# Altium PCB obc-db.PcbDoc
Units mm, origin at the board's own origin, x right, y up, seen from the top; angles counter-clockwise.
Board outline 90.17 x 95.88 mm, 4 copper layers (F.Cu, In1.Cu, In2.Cu, B.Cu); 57 components, 155 nets, 316 pads, 84 vias.
Unrouted connection lines stored in the file: 2.
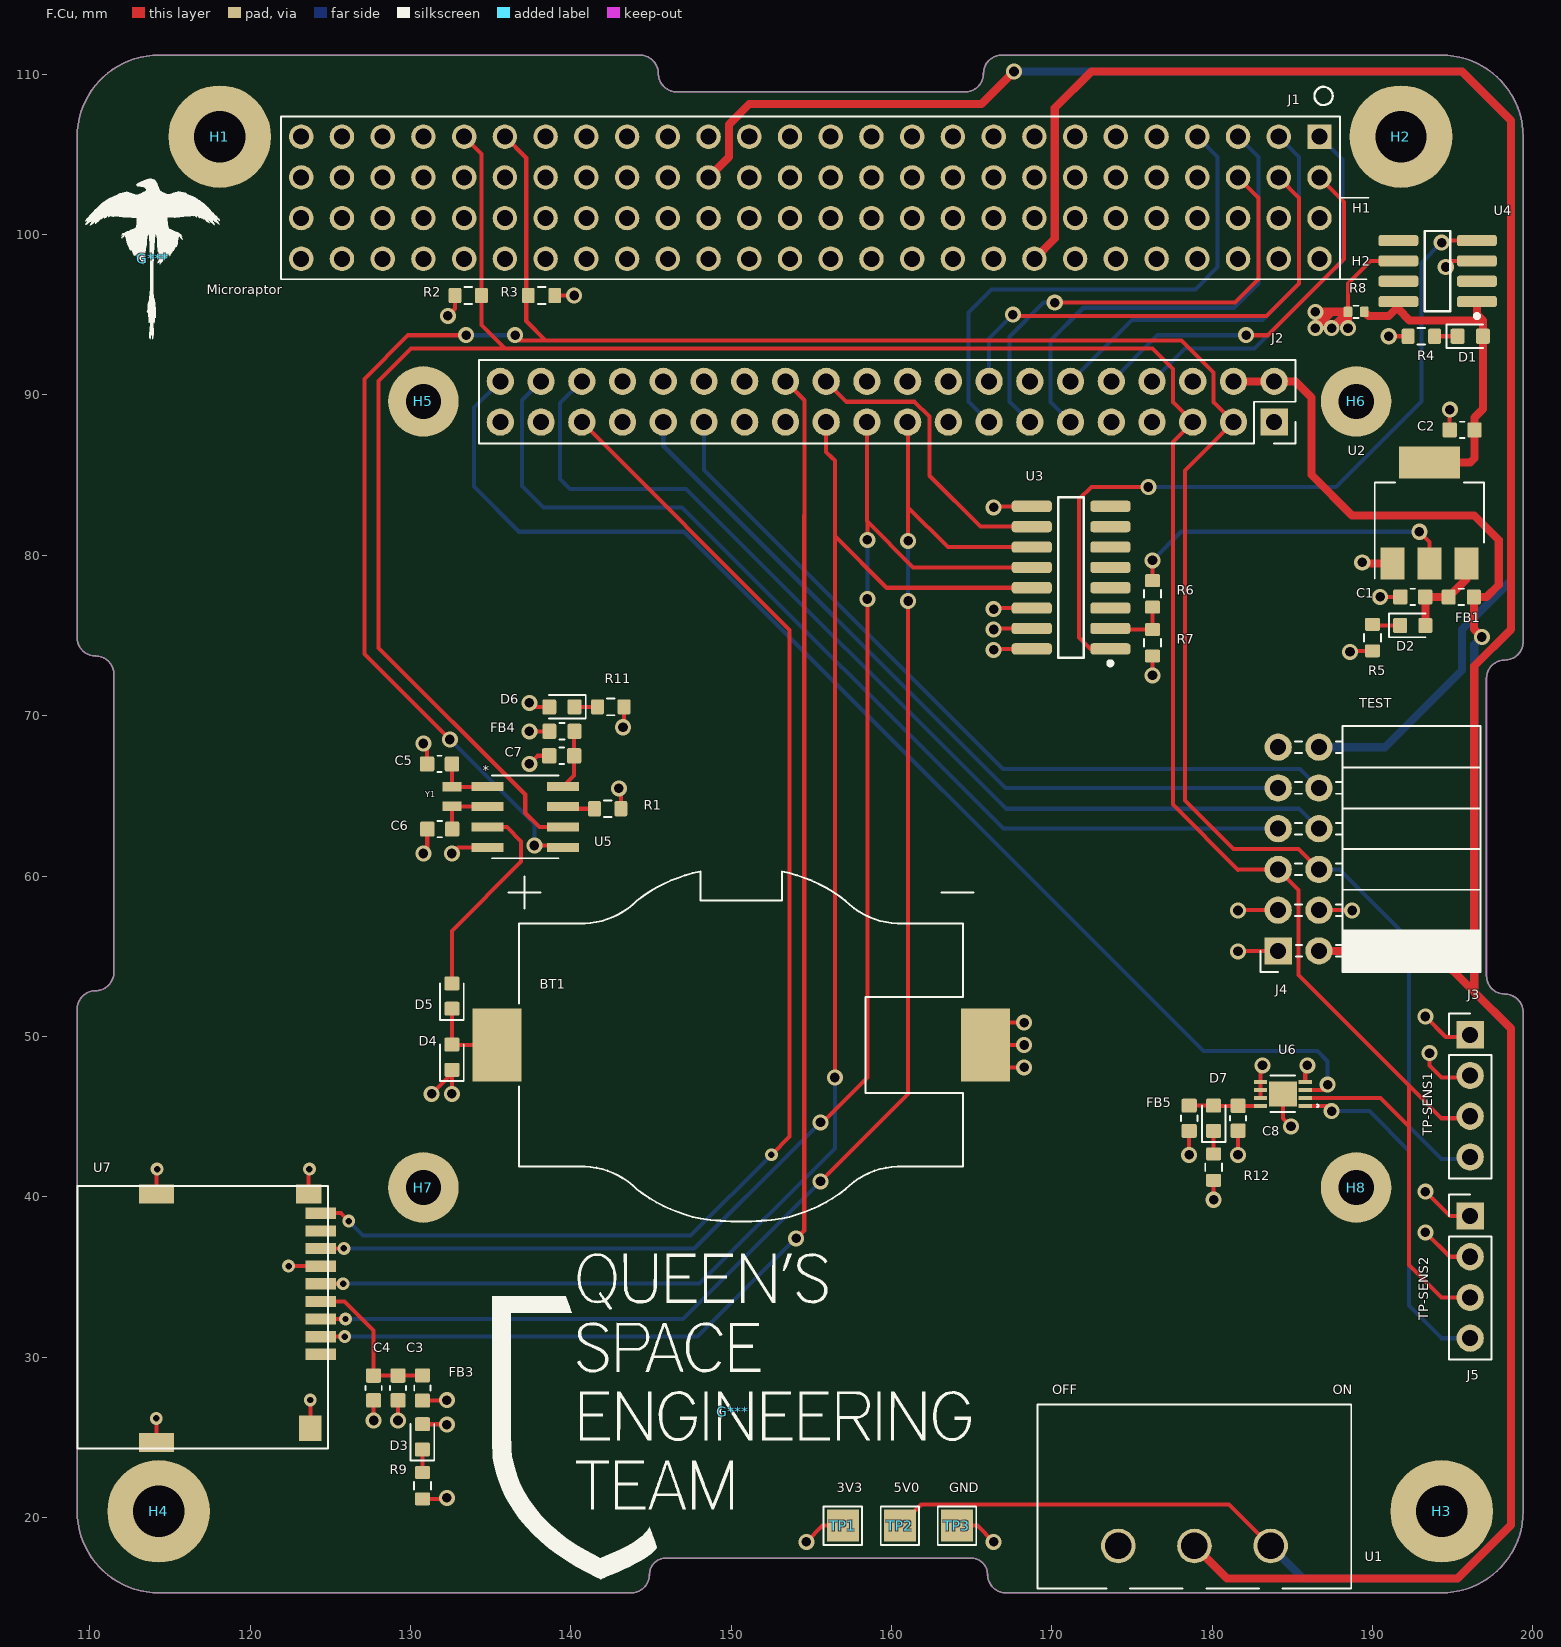
[diagram p0: F.Cu view]
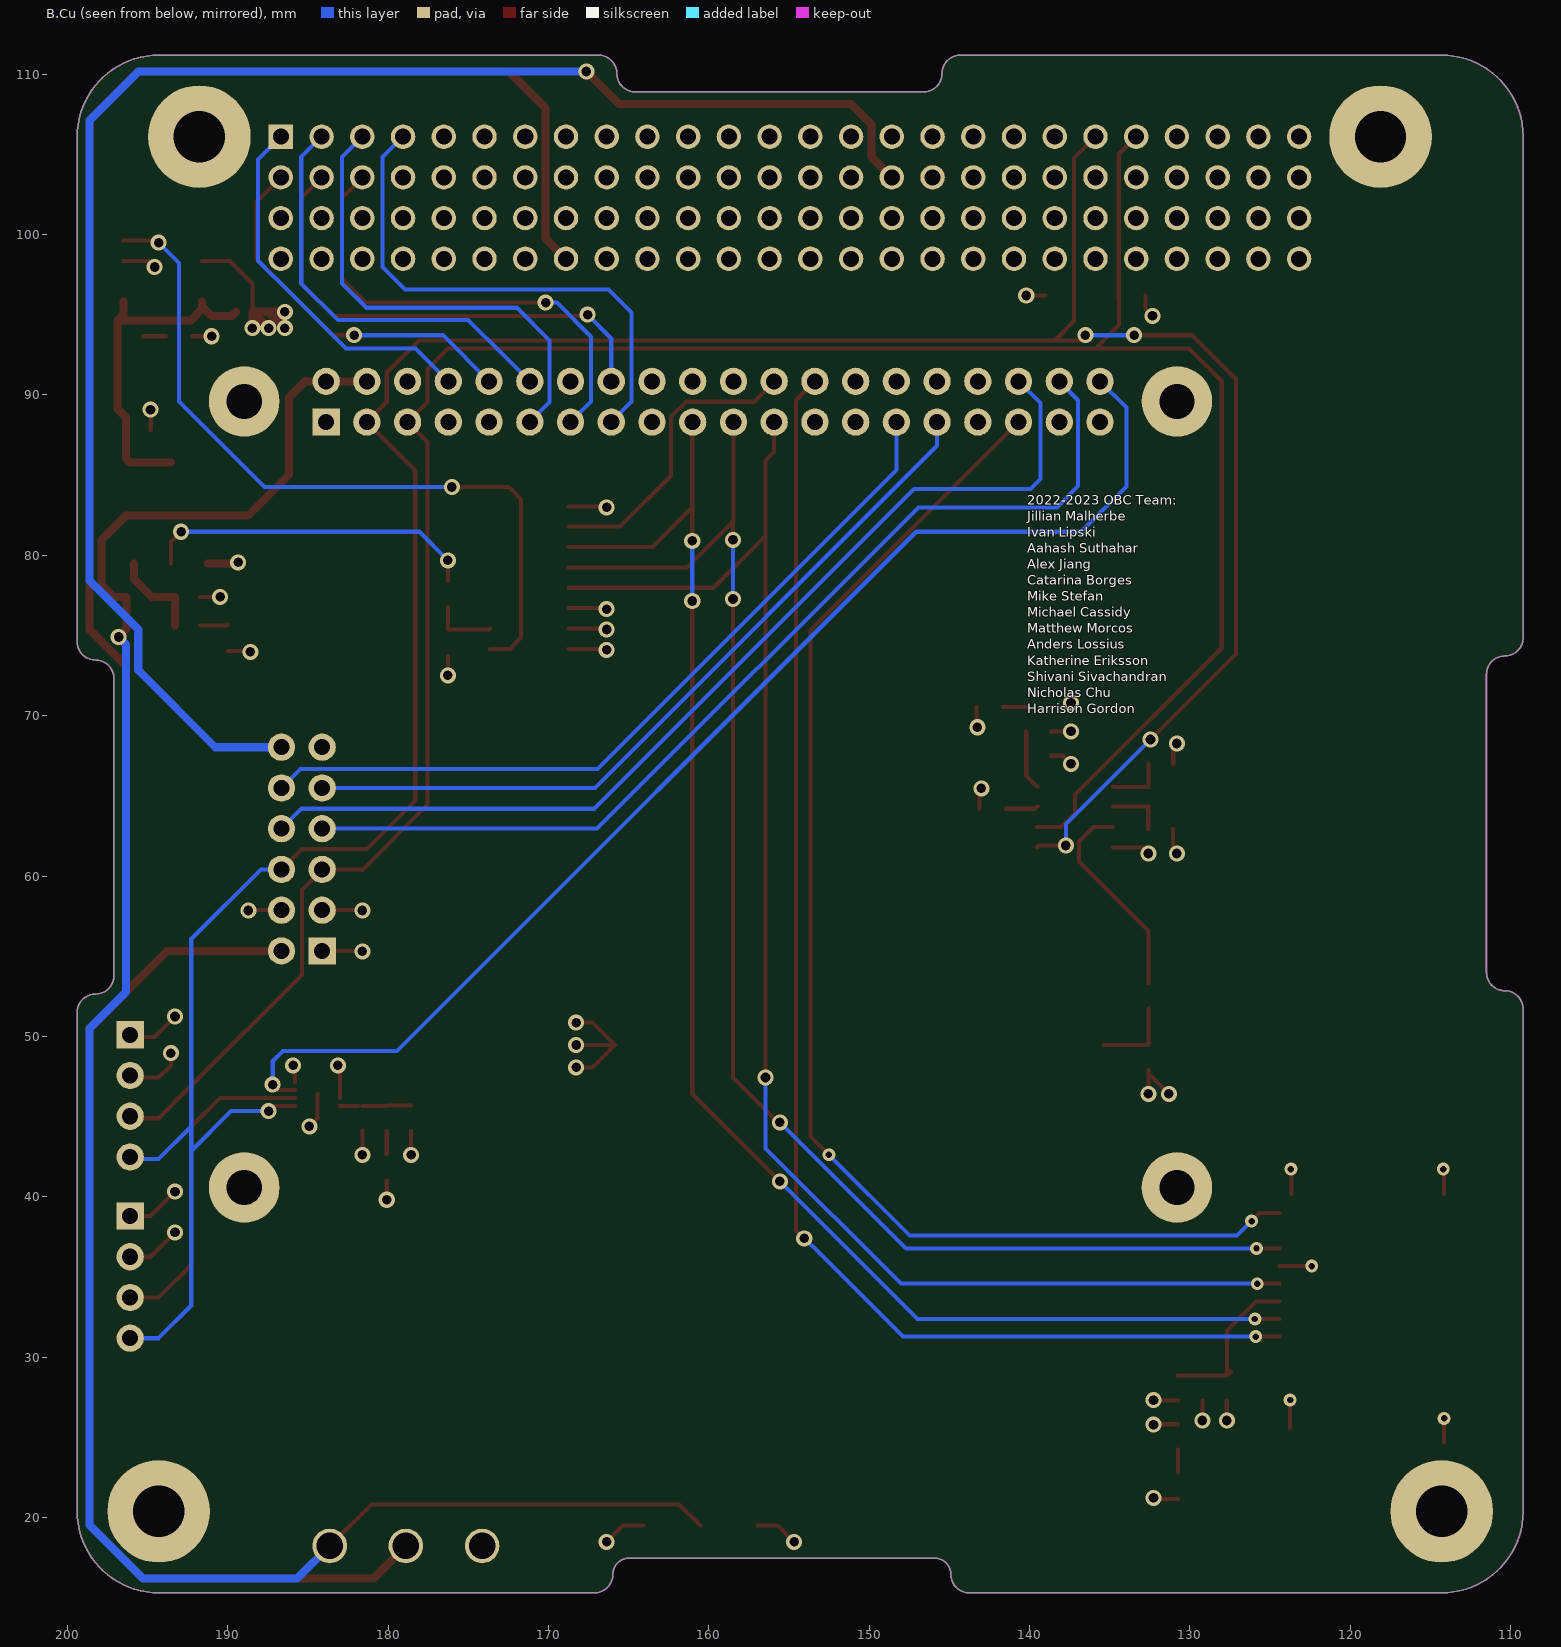
[diagram p1: B.Cu view, seen from below]
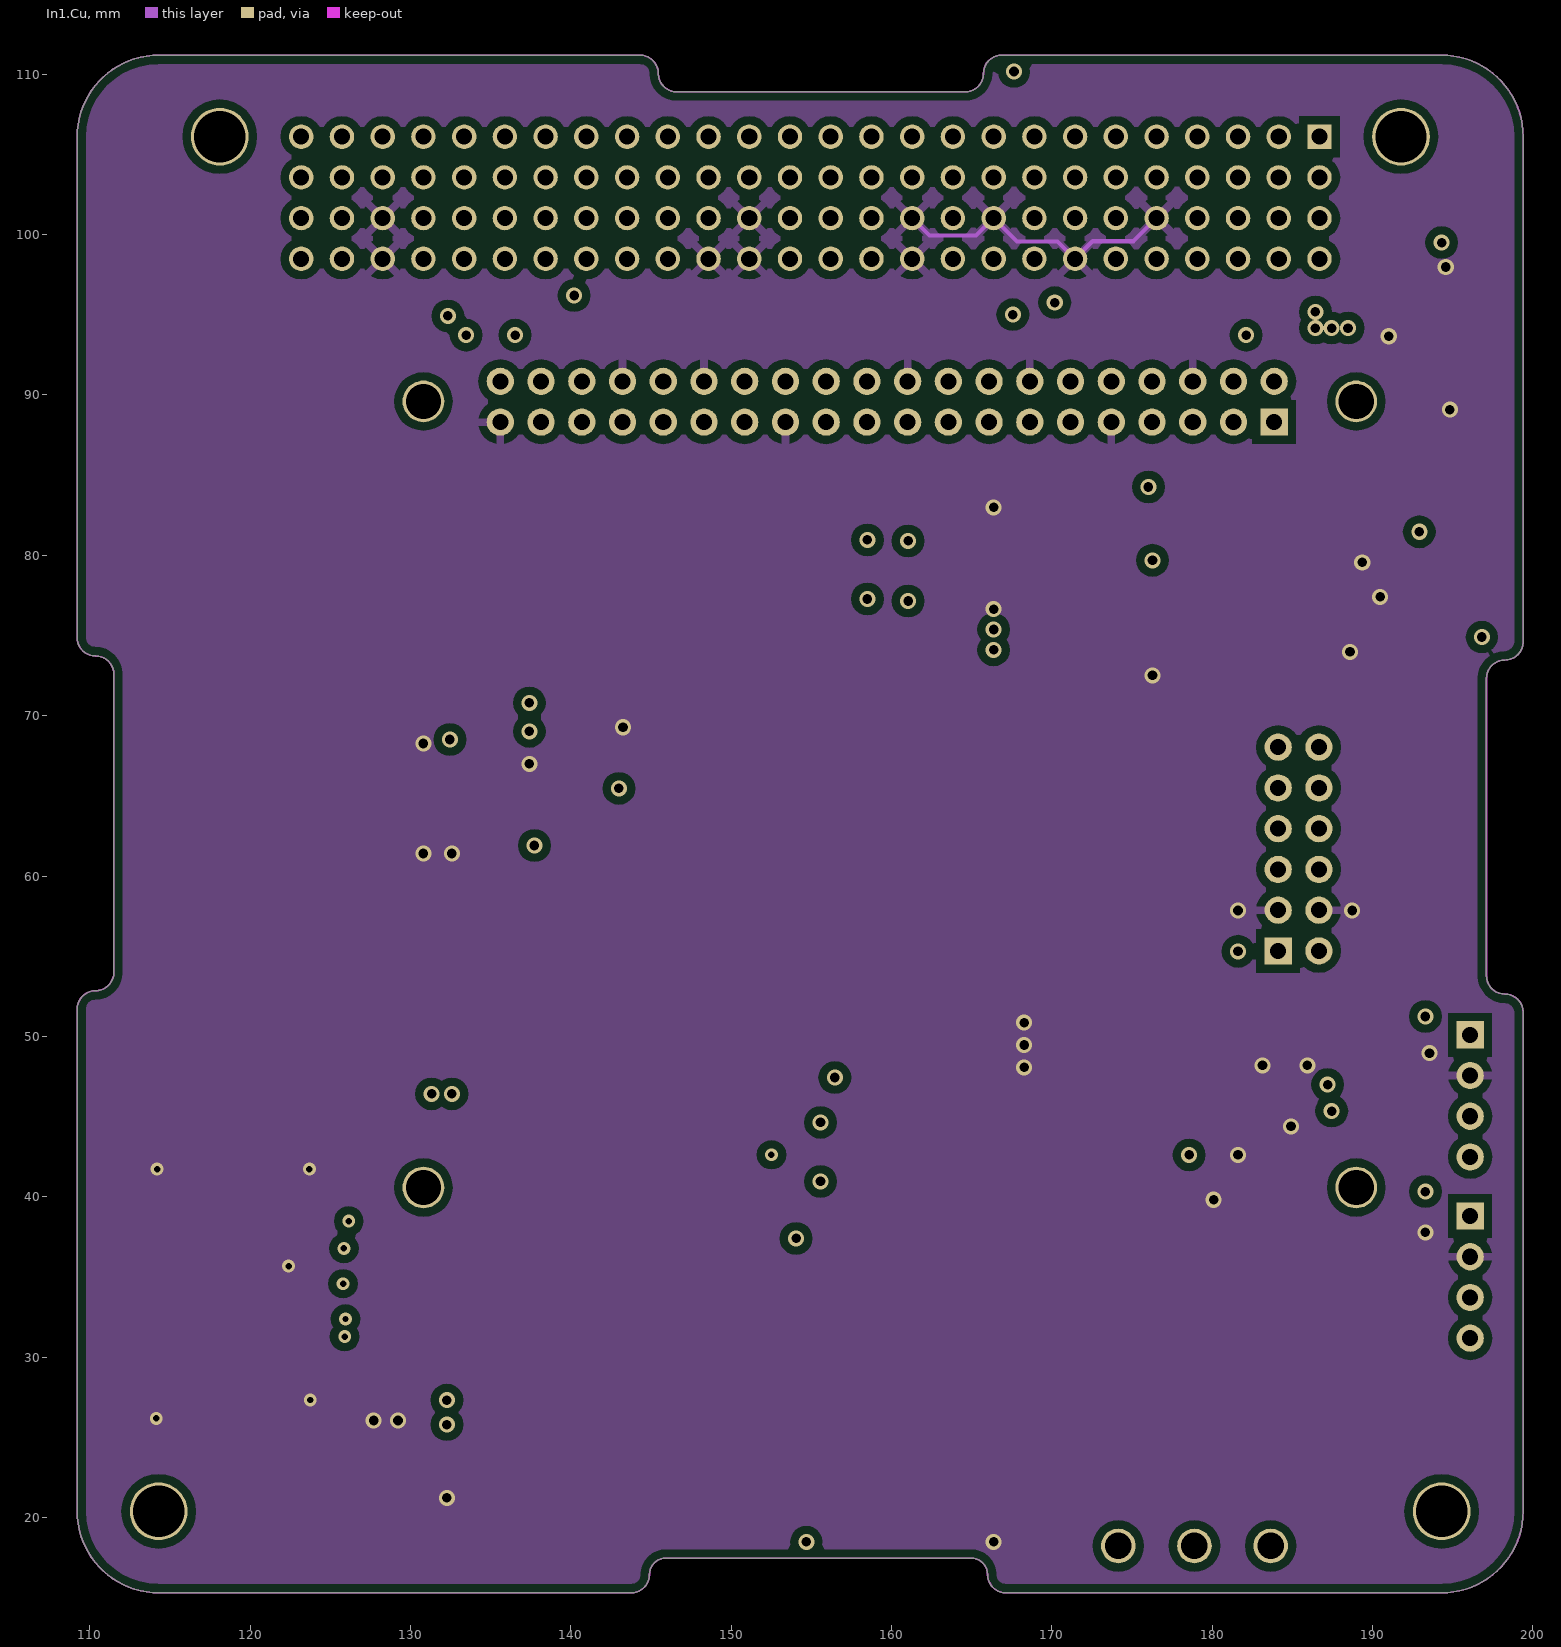
[diagram p2: In1.Cu]
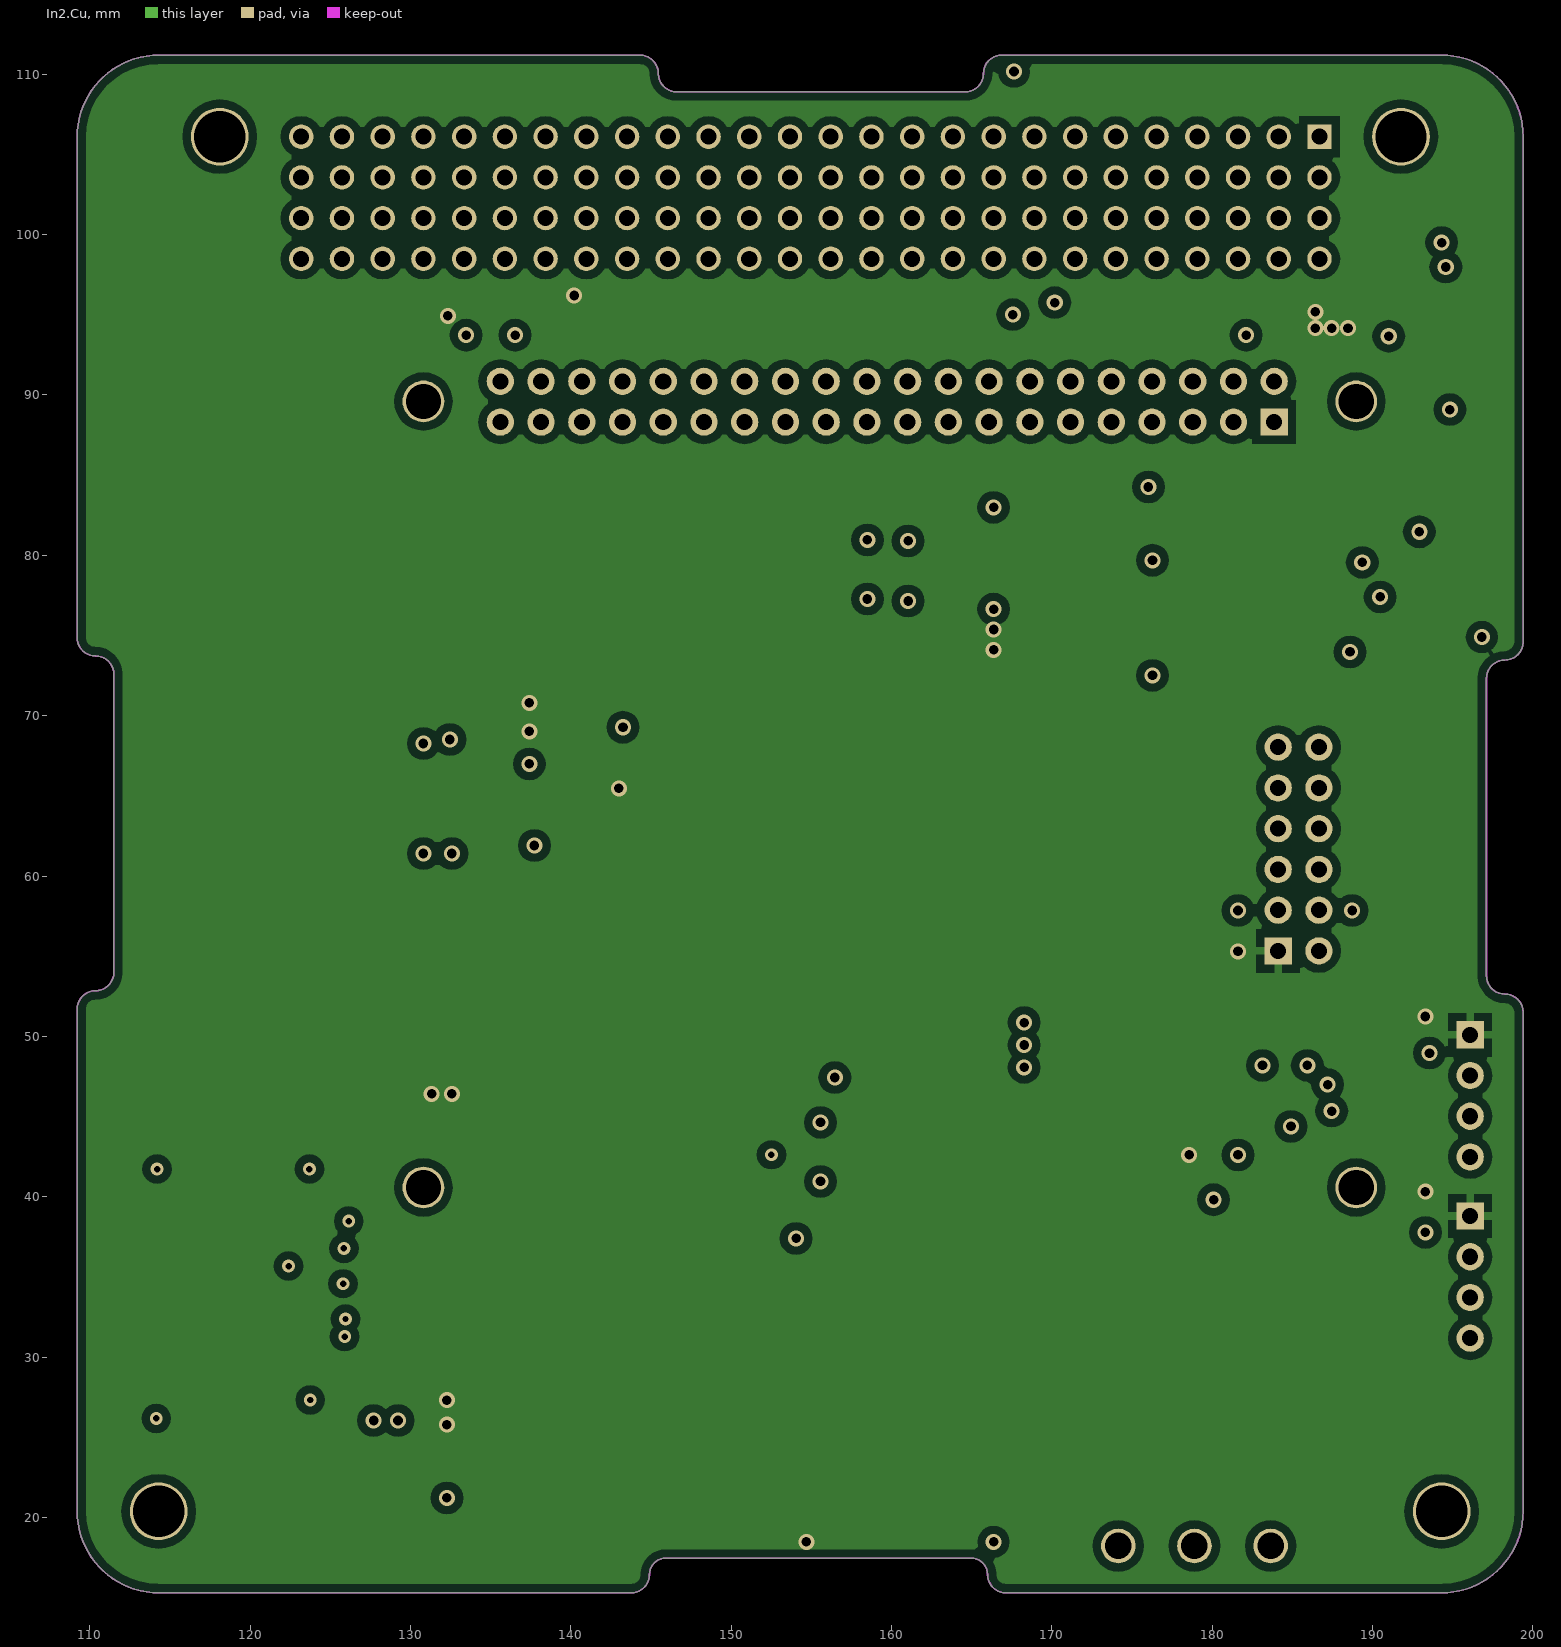
[diagram p3: In2.Cu]

## Layer stack, top to bottom
F.Mask: solder mask 0.0102, Solder Resist, Dk 3.5
F.Cu: signal copper 0.0356
Dielectric 1: dielectric 0.32, FR-4, Dk 4.8
In1.Cu: signal copper 0.0356
Dielectric2: dielectric 0.32, FR-4, Dk 4.8
In2.Cu: signal copper 0.0356
Dielectric3: dielectric 0.32, FR-4, Dk 4.8
B.Cu: signal copper 0.0356
B.Mask: solder mask 0.0102, Solder Resist, Dk 3.5

## Board outline
109.22,74.867 109.22,106.109 cw(c114.3,106.109) 114.3,111.189 144.318,111.189 cw(c144.318,110.046) 145.461,110.046 ccw(c146.604,110.046) 146.604,108.903 164.592,108.903 ccw(c164.592,110.046) 165.735,110.046 cw(c166.878,110.046) 194.31,111.189 cw(c194.31,106.109) 199.39,106.109 199.39,74.613 cw(c198.247,74.613) 198.247,73.47 ccw(c198.247,72.327) 197.104,72.327 197.104,53.785 ccw(c198.247,53.785) 198.247,52.642 cw(c198.247,51.499) 199.39,51.499 199.39,20.384 cw(c194.31,20.384) 194.31,15.304 167.132,15.304 cw(c167.132,16.447) 165.989,16.447 ccw(c164.973,16.447) 164.973,17.463 145.923,17.463 ccw(c145.923,16.447) 144.907,16.447 cw(c143.764,16.447) 143.764,15.304 114.3,15.304 cw(c114.3,20.384) 109.22,20.384 109.22,51.707 cw(c110.363,51.707) 110.363,52.85 ccw(c110.363,53.993) 111.506,53.993 111.506,72.581 ccw(c110.363,72.581) 110.363,73.724 cw(c110.363,74.867) 109.22,74.867

## Design rules (kind name [scope] priority, off if disabled: settings)
Clearance "Clearence 0.508_Polygon" [InNamedPolygon('In1.Cu-GND') OR InNamedPolygon('In2.Cu-+3V3')] p1: gap=0.508 ignorepadtopadclearanceinfootprint=FALSE
MinimumSolderMaskSliver [All] p1: minsoldermaskwidth=0
PolygonConnect Polygon_In2.Cu-+3V3_ConnectDirect [IsNamedPolygon('In2.Cu-+3V3') vs IsVia] p1: connectstyle=Direct reliefconductorwidth=0.254 reliefentries=4 polygonreliefangle="90 Angle" airgapwidth=0.254
PolygonConnect Polygon_In2.Cu-+3V3_ConnectRelief45 [IsNamedPolygon('In2.Cu-+3V3') vs (IsThruPin or IsSMTPin) and (PadShape_AllLayers = 'Round')] p2: connectstyle=Relief reliefconductorwidth=0.508 reliefentries=4 polygonreliefangle="45 Angle" airgapwidth=0.508
PolygonConnect Polygon_In2.Cu-+3V3_ConnectRelief90 [IsNamedPolygon('In2.Cu-+3V3') vs (IsThruPin or IsSMTPin) and (PadShape_AllLayers <> 'Round')] p3: connectstyle=Relief reliefconductorwidth=0.508 reliefentries=4 polygonreliefangle="90 Angle" airgapwidth=0.508
PolygonConnect Polygon_In1.Cu-GND_ConnectDirect [IsNamedPolygon('In1.Cu-GND') vs IsVia] p4: connectstyle=Direct reliefconductorwidth=0.254 reliefentries=4 polygonreliefangle="90 Angle" airgapwidth=0.254
PolygonConnect Polygon_In1.Cu-GND_ConnectRelief45 [IsNamedPolygon('In1.Cu-GND') vs (IsThruPin or IsSMTPin) and (PadShape_AllLayers = 'Round')] p5: connectstyle=Relief reliefconductorwidth=0.508 reliefentries=4 polygonreliefangle="45 Angle" airgapwidth=0.508
PolygonConnect Polygon_In1.Cu-GND_ConnectRelief90 [IsNamedPolygon('In1.Cu-GND') vs (IsThruPin or IsSMTPin) and (PadShape_AllLayers <> 'Round')] p6: connectstyle=Relief reliefconductorwidth=0.508 reliefentries=4 polygonreliefangle="90 Angle" airgapwidth=0.508
RoutingVias [All] p1: holewidth=0.711 width=1.27 viastyle="Through Hole" minholewidth=0.711 minwidth=1.27 maxholewidth=0.711 maxwidth=1.27
SilkToSilkClearance [All] p1: silktosilkclearance=0
SilkToSolderMaskClearance [IsPad] p1: minsilkscreentomaskgap=0 clearancetoexposedcopper=TRUE
SolderMaskExpansion [All] p1: expansion=0.102 istentingtop=FALSE
Width [All] p1: maxlimit=10 minlimit=0.254 preferedwidth=0.254 minimp=50.000000 maximp=50.000000 favimp=50.000000
27 further rules are at their usual default settings.

## Components (designator, comment, footprint, x,y, rotation, side; value= is the part's Value field where it differs from the comment)
BT1 "BHSD-2032-SM" BAT_BHSD-2032-SM 150.622,49.467 r0 top
C1 "22uF" C_0603_1608Metric 192.507,77.407 r0 top
C2 "22uF" C_0603_1608Metric 195.58,87.821 r180 top
C3 "10uF" C_0603_1608Metric 129.226,28.077 r270 top
C4 "0.1uF" C_0603_1608Metric 127.702,28.077 r270 top
C5 "18pF" C_0603_1608Metric 131.813,66.993 r0 top
C6 "18pF" C_0603_1608Metric 131.826,62.929 r0 top
C7 "10uF" C_0603_1608Metric 139.433,67.501 r0 top
C8 "0.1uF" C_0603_1608Metric 181.61,44.895 r270 top
D1 "LED" LED_0603_1608Metric 196.088,93.663 r0 top
D2 "LED" LED_0603_1608Metric 192.507,75.629 r0 top
D3 "LED" LED_0603_1608Metric 130.75,25.029 r90 top
D4 "DIODE" D_0603_1608Metric 132.588,48.705 r90 top
D5 "DIODE" D_0603_1608Metric 132.588,52.515 r90 top
D6 "LED" LED_0603_1608Metric 139.446,70.549 r180 top
D7 "LED" LED_0603_1608Metric 180.086,44.895 r90 top
FB1 "100R @ 100 MHz" L_0603_1608Metric 195.529,77.407 r0 top
FB3 "100R @ 100 MHz" L_0603_1608Metric 130.75,28.077 r90 top
FB4 "100R @ 100 MHz" L_0603_1608Metric 139.446,69.025 r0 top
FB5 "100R @ 100 MHz" L_0603_1608Metric 178.562,44.895 r90 top
G*** "LOGO" microraptor 113.919,98.489 r0 top
G*** "LOGO" Logosmaller 150.114,26.607 r0 top
H1 "MountingHole_Pad" MountingHole_3.2mm_M3_Pad_TopBottom 118.11,106.109 r0 top
H2 "MountingHole_Pad" MountingHole_3.2mm_M3_Pad_TopBottom 191.77,106.109 r0 top
H3 "MountingHole_Pad" MountingHole_3.2mm_M3_Pad_TopBottom 194.31,20.384 r0 top
H4 "MountingHole_Pad" MountingHole_3.2mm_M3_Pad_TopBottom 114.3,20.384 r0 top
H5 "MountingHole_Pad" MountingHole_2.2mm_M2_Pad_TopBottom 130.81,89.599 r0 top
H6 "MountingHole_Pad" MountingHole_2.2mm_M2_Pad_TopBottom 188.976,89.599 r0 top
H7 "MountingHole_Pad" MountingHole_2.2mm_M2_Pad_TopBottom 130.81,40.577 r0 top
H8 "MountingHole_Pad" MountingHole_2.2mm_M2_Pad_TopBottom 188.976,40.577 r0 top
J1 "PC104_Connector" pc104-connector 156.21,103.569 r270 top
J2 "Raspberry Pi 4 Connector" PinSocket_2x20_P2.54mm_Vertical 183.866,88.309 r270 top
J3 "Temp Sens1 Connector" PinHeader_1x04_P2.54mm_Vertical 196.088,50.102 r0 top
J4 "Test Connector" PinSocket_2x06_P2.54mm_Horizontal 184.113,55.334 r180 top
J5 "Temp Sens2 Connector" PinHeader_1x04_P2.54mm_Vertical 196.088,38.799 r0 top
R1 "10k" R_0603_1608Metric 142.303,64.199 r180 top
R2 "10k" R_0603_1608Metric 133.604,96.203 r0 top
R3 "10k" R_0603_1608Metric 138.176,96.203 r180 top
R4 "2.2k" R_0603_1608Metric 193.04,93.663 r180 top
R5 "2.2k" R_0603_1608Metric 189.992,74.867 r270 top
R6 "20k" R_0603_1608Metric 176.276,77.598 r270 top
R7 "10k" R_0603_1608Metric 176.276,74.55 r270 top
R8 "100m" R_0402_1005Metric 188.976,95.187 r180 top
R9 "2.2k" R_0603_1608Metric 130.75,21.981 r270 top
R11 "2.2k" R_0603_1608Metric 142.494,70.549 r0 top
R12 "2.2k" R_0603_1608Metric 180.086,41.847 r270 top
TP1 "3V3" TestPoint_Pad_2.0x2.0mm 156.972,19.495 r0 top
TP2 "5V0" TestPoint_Pad_2.0x2.0mm 160.528,19.495 r0 top
TP3 "GND" TestPoint_Pad_2.0x2.0mm 164.084,19.495 r0 top
U1 "L102021MS02Q" L102021MS02Q 183.642,18.225 r180 top
U2 "AZ1117IH-3.3TRG1" SOT-223-3_TabPin2 193.548,82.639 r90 top
U3 "MCP3008-I/SL" Microchip-MCP3008-I_SL-Level_A 171.196,78.614 r180 top
U4 "MAX4372FESA+" Maxim-MAX4372FESA+-Level_A 194.056,97.727 r180 top
U5 "MCP79400T-I/SN" MCP79400T-I&slash_SN 137.16,63.691 r0 top
U6 "MCP9808T-E/MC" MCP9808T-E&slash_MC 184.404,46.419 r180 top
U7 "MR01A-01211" MR01A-01211 109.25,40.679 r270 top
Y1 "CM9V-T1A" XTAL_CM9V-T1A-32.768KHZ-9PF-20PPM-TA-QC 132.588,64.961 r270 top

## Footprints (in the part's own frame and the unit in brackets; to place one, negate y for a bottom-side part, rotate by r counter-clockwise, add the part's x,y. Pads: shape width x height; smd on the part's side, far side on the other; paste and mask are expansions set on the pad)
BAT_BHSD-2032-SM [mm]
  rect 3.05x4.57 smd mask+0: +(-15.235,0) -(15.235,0)
  silkscreen extent -14.5,-11.02 14.5,10.83
C_0603_1608Metric [mm]
  rrect25% 0.9x0.95 smd mask+0: 1(-0.775,0) 2(0.775,0)
  silkscreen extent -0.14,-0.51 0.14,0.51
D_0603_1608Metric [mm]
  rrect25% 0.875x0.95 smd mask+0: 1(-0.787,0) 2(0.787,0)
  silkscreen extent -1.49,-0.73 0.8,0.73
L102021MS02Q [mil]
  round 85 hole 65 paste-99999 mask+0: 1(0,0) 2(187.01,0) 3(374.02,0)
  silkscreen extent -198,-348 572,105
L_0603_1608Metric [mm]
  rrect25% 0.875x0.95 smd mask+0: 1(-0.787,0) 2(0.787,0)
  silkscreen extent -0.16,-0.51 0.16,0.51
LED_0603_1608Metric [mm]
  rrect25% 0.875x0.95 smd mask+0: 1(-0.787,0) 2(0.787,0)
  silkscreen extent -1.49,-0.73 0.8,0.73
Logosmaller [mm]
  silkscreen extent -15.01,-10.45 14.83,9.86
Maxim-MAX4372FESA+-Level_A [mm]
  rrect50% 2.5x0.7 smd mask+0: 1(-2.45,1.905) 2(-2.45,0.635) 3(-2.45,-0.635) 4(-2.45,-1.905) 5(2.45,-1.905) 6(2.45,-0.635) 7(2.45,0.635) 8(2.45,1.905)
  silkscreen extent -2.58,-2.5 0.8,2.93
MCP9808T-E&slash_MC [mil]
  rect 32x10 smd mask+0: 1(-55,29.53) 2(-55,9.84) 3(-55,-9.84) 4(-55,-29.53) 5(55,-29.53) 6(55,-9.84) 7(55,9.84) 8(55,29.53)
  rect 69x61 smd mask+0: 9(0,0)
  silkscreen extent -88,-45 31,45
MCP79400T-I&slash_SN [mil]
  rect 78x22 smd mask+0: 1(-93,75) 2(-93,25) 3(-93,-25) 4(-93,-75) 5(93,-75) 6(93,-25) 7(93,25) 8(93,75)
  silkscreen extent -82,-102 82,102
Microchip-MCP3008-I_SL-Level_A [mm]
  rrect50% 2.5x0.7 smd mask+0: 1(-2.45,4.445) 2(-2.45,3.175) 3(-2.45,1.905) 4(-2.45,0.635) 5(-2.45,-0.635) 6(-2.45,-1.905) 7(-2.45,-3.175) 8(-2.45,-4.445) 9(2.45,-4.445) 10(2.45,-3.175) 11(2.45,-1.905) 12(2.45,-0.635) 13(2.45,0.635) 14(2.45,1.905) 15(2.45,3.175) 16(2.45,4.445)
  silkscreen extent -2.58,-5 0.8,5.47
microraptor [mm]
  silkscreen extent -4.2,-5 4.2,5
MountingHole_2.2mm_M2_Pad_TopBottom [mm]
  round 4.4 smd paste-4.4 mask+0: 1(0,0)
  round 4.4 smd far side paste-4.4 mask+0: 1(0,0)
  round 2.6 hole 2.2 paste-2539.97 mask+0: 1(0,0)
MountingHole_3.2mm_M3_Pad_TopBottom [mm]
  round 6.4 smd paste-6.4 mask+0: 1(0,0)
  round 6.4 smd far side paste-6.4 mask+0: 1(0,0)
  round 3.6 hole 3.2 paste-2539.97 mask+0: 1(0,0)
MR01A-01211 [mm]
  rect 0.7x1.9 smd mask+0: 1(10.505,15.16) 2(9.405,15.16) 3(8.305,15.16) 4(7.205,15.16) 5(6.105,15.16) 6(5.005,15.16) 7(3.905,15.16) 8(2.805,15.16) 9(1.705,15.16)
  rect 1.2x1.6 smd mask+0: 10(0.505,14.408)
  rect 1.2x2.2 smd mask+0: 11(0.505,4.908) 12(16.005,4.908)
  rect 1.6x1.4 smd mask+0: 13(15.105,14.508)
  silkscreen extent 0,0 16.38,15.62
pc104-connector [mil]
  rect 60x60 hole 39.37 paste-99999 mask+0: 1(-100,1200)
  round 60 hole 39.37 paste-99999 mask+0: 2(0,1200) 3(-100,1100) 4(0,1100) 5(-100,1000) 6(0,1000) 7(-100,900) 8(0,900) 9(-100,800) 10(0,800) 11(-100,700) 12(0,700) 13(-100,600) 14(0,600) 15(-100,500) 16(0,500) 17(-100,400) 18(0,400) 19(-100,300) 20(0,300) 21(-100,200) 22(0,200) 23(-100,100) 24(0,100) 25(-100,0) 26(0,0) 27(-100,-100) 28(0,-100) 29(-100,-200) 30(0,-200) 31(-100,-300) 32(0,-300) 33(-100,-400) 34(0,-400) 35(-100,-500) 36(0,-500) 37(-100,-600) 38(0,-600) 39(-100,-700) 40(0,-700) 41(-100,-800) 42(0,-800) 43(-100,-900) 44(0,-900) 45(-100,-1000) 46(0,-1000) 47(-100,-1100) 48(0,-1100) 49(-100,-1200) 50(0,-1200) 51(-100,-1300) 52(0,-1300) 53(100,1200) 54(200,1200) 55(100,1100) 56(200,1100) 57(100,1000) 58(200,1000) 59(100,900) 60(200,900) 61(100,800) 62(200,800) 63(100,700) 64(200,700) 65(100,600) 66(200,600) 67(100,500) 68(200,500) 69(100,400) 70(200,400) 71(100,300) 72(200,300) 73(100,200) 74(200,200) 75(100,100) 76(200,100) 77(100,0) 78(200,0) 79(100,-100) 80(200,-100) 81(100,-200) 82(200,-200) 83(100,-300) 84(200,-300) 85(100,-400) 86(200,-400) 87(100,-500) 88(200,-500) 89(100,-600) 90(200,-600) 91(100,-700) 92(200,-700) 93(100,-800) 94(200,-800) 95(100,-900) 96(200,-900) 97(100,-1000) 98(200,-1000) 99(100,-1100) 100(200,-1100) 101(100,-1200) 102(200,-1200) 103(100,-1300) 104(200,-1300)
  silkscreen extent -150,-1350 250,1320
PinHeader_1x04_P2.54mm_Vertical [mm]
  rect 1.7x1.7 hole 1 paste-2539.97 mask+0: 1(0,0)
  rrect100% 1.7x1.7 hole 1 paste-2539.97 mask+0: 2(0,-2.54) 3(0,-5.08) 4(0,-7.62)
  silkscreen extent -1.33,-8.95 1.33,1.33
PinSocket_2x06_P2.54mm_Horizontal [mm]
  rect 1.7x1.7 hole 1 paste-2539.97 mask+0: 1(0,0)
  rrect100% 1.7x1.7 hole 1 paste-2539.97 mask+0: 2(-2.54,0) 3(0,-2.54) 4(-2.54,-2.54) 5(0,-5.08) 6(-2.54,-5.08) 7(0,-7.62) 8(-2.54,-7.62) 9(0,-10.16) 10(-2.54,-10.16) 11(0,-12.7) 12(-2.54,-12.7)
  silkscreen extent -12.63,-14.03 1.11,1.33
PinSocket_2x20_P2.54mm_Vertical [mm]
  rect 1.7x1.7 hole 1 paste-2539.97 mask+0: 1(0,0)
  rrect100% 1.7x1.7 hole 1 paste-2539.97 mask+0: 2(-2.54,0) 3(0,-2.54) 4(-2.54,-2.54) 5(0,-5.08) 6(-2.54,-5.08) 7(0,-7.62) 8(-2.54,-7.62) 9(0,-10.16) 10(-2.54,-10.16) 11(0,-12.7) 12(-2.54,-12.7) 13(0,-15.24) 14(-2.54,-15.24) 15(0,-17.78) 16(-2.54,-17.78) 17(0,-20.32) 18(-2.54,-20.32) 19(0,-22.86) 20(-2.54,-22.86) 21(0,-25.4) 22(-2.54,-25.4) 23(0,-27.94) 24(-2.54,-27.94) 25(0,-30.48) 26(-2.54,-30.48) 27(0,-33.02) 28(-2.54,-33.02) 29(0,-35.56) 30(-2.54,-35.56) 31(0,-38.1) 32(-2.54,-38.1) 33(0,-40.64) 34(-2.54,-40.64) 35(0,-43.18) 36(-2.54,-43.18) 37(0,-45.72) 38(-2.54,-45.72) 39(0,-48.26) 40(-2.54,-48.26)
  silkscreen extent -3.87,-49.59 1.33,1.33
R_0402_1005Metric [mm]
  rrect25% 0.54x0.64 smd mask+0: 1(-0.51,0) 2(0.51,0)
  silkscreen extent -0.15,-0.38 0.15,0.38
R_0603_1608Metric [mm]
  rrect25% 0.8x0.95 smd mask+0: 1(-0.825,0) 2(0.825,0)
  silkscreen extent -0.24,-0.52 0.24,0.52
SOT-223-3_TabPin2 [mm]
  rect 2x1.5 smd mask+0: 1(-3.15,2.3) 2(-3.15,0) 3(-3.15,-2.3)
  rect 2x3.8 smd mask+0: 2(3.15,0)
  silkscreen extent -4.1,-3.41 1.91,3.41
TestPoint_Pad_2.0x2.0mm [mm]
  rect 2x2 smd paste-2 mask+0: 1(0,0)
  silkscreen extent -1.2,-1.2 1.2,1.2
XTAL_CM9V-T1A-32.768KHZ-9PF-20PPM-TA-QC [mm]
  rect 0.6x1.2 smd mask+0: 1(-0.6,0) 2(0.6,0)

## Part data
BT1: library part BAT_BHSD-2032-SM, MANUFACTURER="Memory Protection Devices, Inc.", MAXIMUM_PACKAGE_HEIGHT="28.19 mm", PARTREV=D, STANDARD="Manufacturer Recommendations", Sheetfile=real-time-clock.kicad_sch, Sheetname=real-time-clock
C1 C2 C3 C4 C5 C6 C7 C8: library part C_0603_1608Metric, "Capacitor SMD 0603 (1608 Metric), square (rectangular) end terminal, IPC_7351 nominal, (Body size source: IPC-SM-782 page 76, https://www.pcb-3d.com/wordpress/wp-content/uploads/ipc-sm-782a_amendment_1_and_2.pdf), generated with kicad-footprint-generator"
  C1 C2: Sheetfile=power-converter.kicad_sch, Sheetname=power-converter
  C3 C4: Sheetfile=micro-sd-card-reader.kicad_sch, Sheetname=micro-sd-card-reader
  C5 C6 C7: Sheetfile=real-time-clock.kicad_sch, Sheetname=real-time-clock
  C8: Sheetfile=temperature-sensor.kicad_sch, Sheetname=temperature-sensor
D1 D2 D3 D6 D7: library part LED_0603_1608Metric, "LED SMD 0603 (1608 Metric), square (rectangular) end terminal, IPC_7351 nominal, (Body size source: http://www.tortai-tech.com/upload/download/2011102023233369053.pdf), generated with kicad-footprint-generator"
  D1 D2: Sheetfile=power-converter.kicad_sch, Sheetname=power-converter
  D3: Sheetfile=micro-sd-card-reader.kicad_sch, Sheetname=micro-sd-card-reader
  D6: Sheetfile=real-time-clock.kicad_sch, Sheetname=real-time-clock
  D7: Sheetfile=temperature-sensor.kicad_sch, Sheetname=temperature-sensor
D4 D5: library part D_0603_1608Metric, "Diode SMD 0603 (1608 Metric), square (rectangular) end terminal, IPC_7351 nominal, (Body size source: http://www.tortai-tech.com/upload/download/2011102023233369053.pdf), generated with kicad-footprint-generator", Sheetfile=real-time-clock.kicad_sch, Sheetname=real-time-clock, Spice_Netlist_Enabled=Y, Spice_Primitive=D
FB1 FB3 FB4 FB5: library part L_0603_1608Metric, "Inductor SMD 0603 (1608 Metric), square (rectangular) end terminal, IPC_7351 nominal, (Body size source: http://www.tortai-tech.com/upload/download/2011102023233369053.pdf), generated with kicad-footprint-generator"
  FB1: Sheetfile=power-converter.kicad_sch, Sheetname=power-converter
  FB3: Sheetfile=micro-sd-card-reader.kicad_sch, Sheetname=micro-sd-card-reader
  FB4: Sheetfile=real-time-clock.kicad_sch, Sheetname=real-time-clock
  FB5: Sheetfile=temperature-sensor.kicad_sch, Sheetname=temperature-sensor
G***: library part microraptor
G***: library part Logosmaller
H1 H2 H3 H4: library part MountingHole_3.2mm_M3_Pad_TopBottom, "Mounting Hole 3.2mm, M3", Sheetfile=obc-db.kicad_sch
H5 H6 H7 H8: library part MountingHole_2.2mm_M2_Pad_TopBottom, "Mounting Hole 2.2mm, M2", Sheetfile=obc-db.kicad_sch
J1: library part pc104-connector, Sheetfile=obc-db.kicad_sch
J2: library part PinSocket_2x20_P2.54mm_Vertical, "Through hole straight socket strip, 2x20, 2.54mm pitch, double cols (from Kicad 4.0.7), script generated", Sheetfile=obc-db.kicad_sch
J3 J5: library part PinHeader_1x04_P2.54mm_Vertical, "Through hole straight pin header, 1x04, 2.54mm pitch, single row", Sheetfile=obc-db.kicad_sch
J4: library part PinSocket_2x06_P2.54mm_Horizontal, "Through hole angled socket strip, 2x06, 2.54mm pitch, 8.51mm socket length, double cols (from Kicad 4.0.7), script generated", Sheetfile=obc-db.kicad_sch
R1 R2 R3 R4 R5 R6 R7 R9 R11 R12: library part R_0603_1608Metric, "Resistor SMD 0603 (1608 Metric), square (rectangular) end terminal, IPC_7351 nominal, (Body size source: IPC-SM-782 page 72, https://www.pcb-3d.com/wordpress/wp-content/uploads/ipc-sm-782a_amendment_1_and_2.pdf), generated with kicad-footprint-generator"
  R1 R2 R3: Sheetfile=obc-db.kicad_sch
  R4 R5 R6 R7: Sheetfile=power-converter.kicad_sch, Sheetname=power-converter
  R9: Sheetfile=micro-sd-card-reader.kicad_sch, Sheetname=micro-sd-card-reader
  R11: Sheetfile=real-time-clock.kicad_sch, Sheetname=real-time-clock
  R12: Sheetfile=temperature-sensor.kicad_sch, Sheetname=temperature-sensor
R8: library part R_0402_1005Metric, "Resistor SMD 0402 (1005 Metric), square (rectangular) end terminal, IPC_7351 nominal, (Body size source: IPC-SM-782 page 72, https://www.pcb-3d.com/wordpress/wp-content/uploads/ipc-sm-782a_amendment_1_and_2.pdf), generated with kicad-footprint-generator", Sheetfile=current-monitor.kicad_sch, Sheetname=current-monitor
TP1 TP2 TP3: library part TestPoint_Pad_2.0x2.0mm, "SMD rectangular pad as test Point, square 2.0mm side length", Sheetfile=obc-db.kicad_sch
U2: library part SOT-223-3_TabPin2, "module CMS SOT223 4 pins", Sheetfile=power-converter.kicad_sch, Sheetname=power-converter
U3: library part Microchip-MCP3008-I_SL-Level_A, Sheetfile=current-monitor.kicad_sch, Sheetname=current-monitor
U4: library part Maxim-MAX4372FESA+-Level_A, Sheetfile=current-monitor.kicad_sch, Sheetname=current-monitor
U5: library part MCP79400T-I&slash_SN, Sheetfile=real-time-clock.kicad_sch, Sheetname=real-time-clock
U6: library part MCP9808T-E&slash_MC, Sheetfile=temperature-sensor.kicad_sch, Sheetname=temperature-sensor
Y1: library part XTAL_CM9V-T1A-32.768KHZ-9PF-20PPM-TA-QC, MANUFACTURER="Micro Crystal", MAXIMUM_PACKAGE_HEIGHT="0.5 mm", PARTREV=8.0/10.2016, STANDARD="Manufacturer Recommendations", Sheetfile=real-time-clock.kicad_sch, Sheetname=real-time-clock
U1: Sheetfile=obc-db.kicad_sch
U7: Sheetfile=micro-sd-card-reader.kicad_sch, Sheetname=micro-sd-card-reader

## Via types
v1: diameter 1, hole 0.6, F.Cu to B.Cu, tented both sides, 73 vias
v2: diameter 0.8, hole 0.4, F.Cu to B.Cu, tented both sides, 11 vias

## Nets (pads, with @x,y where several pads share a name; then routed paths per layer and width w, separated by ;. In a path a pad name is that pad's centre, name@x,y a point inside that pad or via, vN(x,y) a via of type N, cw(c..) or ccw(c..) an arc to the next point about the centre after c; other vN are vias at no path point)
5VUSB_CHG: J1.32 J4.12 | length 101.7
  F.Cu w0.508: J1.32 149.86,104.839 149.86,106.871 151.13,108.141 165.608,108.141 v1(167.64,110.173)
  B.Cu w0.508: v1(167.64,110.173) 195.58,110.173 198.628,107.125 198.628,78.423 195.58,75.375 195.58,72.835 190.779,68.034 J4.12
+3V3: D3.2 D4.1 D6.2 FB3.1 FB4.1 FB5.1 J3.1 J4.1 J5.1 R1.1 R2.1 R3.1 R8.2 TP1.1 U3.15 U3.16 U4.6 | length 42.9
  F.Cu w0.254: D3.2 132.249,25.817 v1(132.274,25.791) ; FB3.1 132.249,27.29 v1(132.274,27.315) ; v1(131.318,46.419) 132.588,47.689 D4.1 v1(132.588,46.419) ; v1(132.334,94.933) 132.779,95.378 R2.1 ; v1(137.414,69.025) FB4.1 ; v1(137.414,70.803) 137.668,70.549 D6.2 ; R3.1 v1(140.208,96.203) ; v1(143.002,65.469) 143.128,65.343 R1.1 ; v1(154.686,18.479) 155.702,19.495 TP1.1 ; v1(166.37,74.105) 166.434,74.169 U3.16 ; v1(166.37,75.375) 166.434,75.439 U3.15 ; v1(178.562,42.609) FB5.1 ; v1(181.61,55.309) 181.635,55.334 J4.1 ; R8.2 188.466,96.963 189.865,98.362 U4.6 ; v1(193.294,40.323) 194.818,38.799 J5.1 ; v1(193.294,51.245) 194.564,49.975 J3.1@196.088,49.975
  F.Cu w0.508: v1(186.436,94.171) 187.452,95.187 ; v1(186.436,95.187) 187.452,95.187 ; v1(187.452,94.171) 187.452,94.173 R8.2 ; v1(188.468,94.171) 188.466,94.173 R8.2 ; 187.452,95.187 R8.2
+5V: FB1.2 J2.2 J2.4 TP2.1 U1.1 | length 129.3
  F.Cu w0.254: TP2.1 161.855,20.822 181.045,20.822 U1.1
  F.Cu w0.508: J2.4 J2.2 185.146,90.849 185.166,90.869 186.182,89.853 186.182,85.027 188.722,82.487 196.342,82.487 197.866,80.963 197.866,78.169 197.104,77.407 FB1.2 196.317,75.4 v1(196.811,74.906)
  B.Cu w0.508: U1.1 185.674,16.193 195.287,16.193 198.628,19.534 198.628,50.483 196.342,52.769 196.342,74.437 v1(196.811,74.906)
ADCS_INT: J1.5 J2.11 | length 29.7
  B.Cu w0.254: J2.11 169.926,89.549 169.926,93.409 171.958,95.441 181.356,95.441 182.88,96.965 182.88,104.839 J1.5
BAT_INT: J1.7 J2.15 | length 32.7
  B.Cu w0.254: J2.15 164.815,89.58 164.815,95.156 166.245,96.586 178.945,96.586 180.34,97.981 180.34,104.839 J1.7
CH1: R6.2 R7.1 U3.2 | length 4.1
  F.Cu w0.254: U3.2 173.71,75.375 R7.1 R6.2
COMM_CTS: J1.3 J2.12 | length 26.5
  B.Cu w0.254: J2.12 172.71,92.393 172.72,92.393 175.006,94.679 183.134,94.679 185.42,96.965 185.42,104.839 J1.3
COMM_RTS: J1.4 J2.16 | length 30.6
  F.Cu w0.254: v1(167.564,95.009) 167.641,94.932 183.387,94.932 185.42,96.965 185.42,102.299 J1.4
  B.Cu w0.254: J2.16 166.086,93.532 v1(167.564,95.009)
COMM_RXD: J1.2 J2.10 | length 23.4
  F.Cu w0.254: v1(182.118,93.728) 183.469,93.728 188.214,98.473 188.214,102.045 J1.2
  B.Cu w0.254: J2.10 176.585,93.728 v1(182.118,93.728)
COMM_TXD: J1.1 J2.8 | length 23.3
  B.Cu w0.254: J2.8 178.298,92.901 182.626,92.901 187.125,97.4 187.141,97.4 188.113,98.371 188.113,104.686 J1.1
EPS_INT: J1.6 J2.13 | length 29.7
  F.Cu w0.254: v1(170.18,95.759) 181.42,95.759 182.88,97.219 182.88,100.521 182.88,102.299 J1.6
  B.Cu w0.254: J2.13 167.355,89.58 167.355,93.632 169.482,95.759 v1(170.18,95.759)
GND: BT1.- C1.1 C2.2 C3.2 C4.2 C5.1 C6.1 C7.1 C8.2 J1.61 J1.66 J1.69 J1.73 J1.74 J1.81 J1.82 J1.84 J1.99 J1.100 J2.6 J2.9 J2.14 J2.20 J2.25 J2.30 J2.34 J2.39 J3.2 J4.3 J4.4 J5.2 R4.2 R5.2 R7.2 R9.2 R11.2 R12.2 TP3.1 U2.1 U3.9 U3.14 U4.3 U5.4 U6.4 U6.5 U6.6 U6.7 U6.9 U7.6 U7.10 U7.11 U7.12 U7.13 | length 84.9
  F.Cu w0.25: v2(114.15,26.179) 114.158,26.171 U7.12 ; U7.11 114.158,41.687 v2(114.2,41.729) ; v2(122.4,35.679) 122.405,35.674 U7.6 ; U7.10 123.658,41.687 v2(123.7,41.729) ; v2(123.75,27.329) 123.758,27.321 U7.13
  F.Cu w0.254: v1(127.702,26.045) C4.2 ; v1(129.226,26.045) C3.2 ; R9.2 132.211,21.156 v1(132.274,21.219) ; v1(130.81,61.405) 131.051,61.646 C6.1 ; v1(130.81,68.263) 131.038,68.035 C5.1 ; v1(132.588,61.405) 132.969,61.786 U5.4 ; v1(137.414,66.993) 137.922,67.501 C7.1 ; v1(143.256,69.279) 143.319,69.342 R11.2 ; TP3.1 165.354,19.495 v1(166.37,18.479) ; v1(166.37,76.645) 166.434,76.709 U3.14 ; v1(166.37,82.995) 166.434,83.059 U3.9 ; v1(168.275,48.07) 167.254,48.07 BT1.- ; v1(168.275,49.467) BT1.- ; v1(168.275,50.864) 167.254,50.864 BT1.- ; v1(176.276,72.518) R7.2 ; v1(180.086,39.815) R12.2 ; v1(181.61,42.609) C8.2 ; v1(181.61,57.849) 181.635,57.874 J4.3 ; U6.7 U6.6 U6.5 183.007,48.07 v1(183.134,48.197) ; U6.9 184.404,44.895 v1(184.912,44.387) ; U6.4 185.801,48.07 v1(185.928,48.197) ; J4.4 188.697,57.874 v1(188.722,57.849) ; v1(188.595,73.978) 188.659,74.042 R5.2 ; v1(190.475,77.407) C1.1 ; v1(191.008,93.663) R4.2 ; v1(193.294,37.783) 194.818,36.259 J5.2 ; v1(193.548,48.959) 193.548,48.197 194.31,47.435 J3.2@196.088,47.435 ; v1(194.564,97.981) 194.945,98.362 U4.3 ; C2.2 194.805,89.078 v1(194.818,89.091)
  F.Cu w0.508: v1(189.357,79.566) 189.434,79.489 U2.1
  In1.Cu w0.254: J1.73 162.379,99.94 165.281,99.94 J1.69 167.821,99.578 170.361,99.578 J1.66 172.55,99.589 175.09,99.589 J1.61
GND_CHG: J4.11
GPIO5: J2.29 J4.10 | length 49.6
  B.Cu w0.254: J2.29 148.306,85.311 166.946,66.671 185.476,66.671 J4.10
GPIO6: J2.31 J4.9 | length 48.7
  B.Cu w0.254: J2.31 145.766,86.835 167.107,65.494 J4.9
GPIO12: J2.32
GPIO13: J2.33
GPIO16: J2.36 J4.8 | length 63
  B.Cu w0.254: J2.36 139.323,89.486 139.323,84.777 139.319,84.773 139.954,84.138 147.193,84.138 167.132,64.199 185.408,64.199 J4.8
GPIO19: J2.35 U7.9 | length 82.3
  F.Cu w0.25: U7.9 125.655,38.974 v2(126.15,38.479) ; J2.35 153.65,75.345 153.65,74.529 153.65,43.756 v2(152.511,42.618)
  B.Cu w0.25: v2(126.15,38.479) 127.05,37.579 139.95,37.579 147.473,37.579 v2(152.511,42.618)
GPIO20: J2.38 J4.7 | length 63
  B.Cu w0.254: J2.38 136.969,89.672 136.969,84.329 138.303,82.995 146.939,82.995 166.98,62.954 J4.7
GPIO21: J2.40 U6.3 | length 78.3
  F.Cu w0.254: U6.3 186.872,46.669 v1(187.198,46.996)
  B.Cu w0.254: J2.40 133.966,89.209 133.966,84.284 136.779,81.471 147.066,81.471 179.451,49.086 186.563,49.086 187.198,48.451 v1(187.198,46.996)
GPIO26: J2.37
I2C_SCL1: J1.43 J2.5 J3.3 J4.5 J5.3 R2.2 U5.6 U6.2 | length 179.9
  F.Cu w0.254: J1.43 134.439,105.02 R2.2@134.439,95.959 ; R2.2 134.429,94.362 135.89,92.901 ; U5.6 138.049,63.056 137.16,63.945 137.16,65.088 128.016,74.232 128.016,90.869 130.048,92.901 135.89,92.901 ; U6.2 190.496,46.169 192.278,44.387 ; J5.3 194.31,33.719 192.278,35.751 192.278,44.387 ; J3.3@196.088,44.895 194.31,44.895 192.278,46.927 ; 135.89,92.901 176.276,92.901 177.546,91.631 177.546,89.549 J2.5 177.546,87.069 177.546,64.453 181.61,60.389 181.635,60.414 J4.5 185.384,59.143 185.384,53.821 192.278,46.927 ; 192.278,44.387 192.278,46.927
I2C_SDA1: J1.41 J2.3 J3.4 J4.6 J5.4 R3.2 U5.5 U6.1 | length 189.9
  F.Cu w0.254: v1(132.461,68.517) 127.127,73.851 127.127,90.996 129.859,93.728 v1(133.477,93.728) ; J1.41 137.223,104.776 137.223,94.616 138.43,93.409 ; v1(136.525,93.728) 136.844,93.409 138.43,93.409 ; v1(137.733,61.906) 139.403,61.906 U5.5 ; U6.1 187.126,45.669 v1(187.452,45.343) ; J4.6 185.378,61.689 181.326,61.689 178.308,64.707 178.308,85.291 J2.3 180.086,89.549 180.086,91.406 178.083,93.409 138.43,93.409
  B.Cu w0.254: v1(132.461,68.517) 137.733,63.245 v1(137.733,61.906) ; v1(133.477,93.728) v1(136.525,93.728) ; J4.6 187.935,60.414 192.278,56.071 192.278,44.387 ; v1(187.452,45.343) 189.798,45.343 192.278,42.863 ; J5.4 194.31,31.179 192.278,33.211 192.278,42.863 ; J3.4@196.088,42.355 194.31,42.355 192.278,44.387 ; 192.278,42.863 192.278,44.387
Net-(BT1-Pad+): BT1.+ D4.2 D5.1 | length 5
  F.Cu w0.254: D5.1 D4.2 132.613,49.467 BT1.+
Net-(C1-Pad2): C1.2 D2.2 FB1.1 U2.3 | length 5.8
  F.Cu w0.508: D2.2 193.294,77.395 C1.2 FB1.1 195.848,78.514 U2.3
Net-(C3-Pad1): C3.1 C4.1 FB3.2 U7.4 | length 10.3
  F.Cu w0.25: U7.4 125.88,33.474 127.702,31.652 C4.1
  F.Cu w0.254: C4.1@127.442,29.112 C4.1 C3.1 129.238,28.865 FB3.2
Net-(C7-Pad2): C7.2 FB4.2 U5.8 | length 3.7
  F.Cu w0.254: U5.8 140.208,66.282 C7.2 140.208,69 FB4.2
Net-(C8-Pad1): C8.1 D7.2 FB5.2 U6.8 | length 4.2
  F.Cu w0.254: FB5.2 D7.2 180.098,45.67 C8.1 ; C8.1@181.865,45.669 U6.8
Net-(D1-Pad1): D1.1 R4.1 | length 1.4
  F.Cu w0.254: R4.1 D1.1
Net-(D2-Pad1): D2.1 R5.1 | length 1.8
  F.Cu w0.254: R5.1 190.055,75.629 D2.1
Net-(D3-Pad1): D3.1 R9.1 | length 1.4
  F.Cu w0.254: R9.1 D3.1
Net-(D6-Pad1): D6.1 R11.1 | length 1.4
  F.Cu w0.254: D6.1 R11.1
Net-(D7-Pad1): D7.1 R12.1 | length 1.4
  F.Cu w0.254: R12.1 D7.1
Net-(U3-Pad1): U3.1 U4.4 | length 47.4
  F.Cu w0.254: U3.1 172.402,74.169 171.704,74.867 171.704,83.503 172.466,84.265 v1(176.022,84.265) ; v1(194.31,99.505) 194.437,99.632 U4.4
  B.Cu w0.254: v1(176.022,84.265) 183.896,84.265 187.706,84.265 193.04,89.599 193.04,98.235 v1(194.31,99.505)
PM_Input: C2.1 D1.2 R6.1 R8.1 U2.2 U4.1 U4.8 | length 42.7
  F.Cu w0.254: R6.1 v1(176.276,79.693) ; v1(192.913,81.471) 193.548,80.836 U2.2@193.548,79.489
  F.Cu w0.508: R8.1 189.74,94.933 191.008,94.933 191.606,95.531 U4.8 191.606,95.351 192.303,94.654 196.875,94.654 ; U2.2@193.548,85.789 196.088,85.789 196.355,86.056 C2.1 196.355,88.596 196.875,89.116 D1.2 196.875,94.654 ; U4.1 196.506,95.023 196.875,94.654
  B.Cu w0.254: v1(176.276,79.693) 178.054,81.471 v1(192.913,81.471)
RTC_MFP: R1.2 U5.7 | length 2
  F.Cu w0.254: U5.7 139.649,64.199 R1.2
SPI1_CE0_N: J2.24 U3.10 | length 18.7
  F.Cu w0.254: J2.24 157.197,89.578 161.438,89.578 162.369,88.647 162.369,84.964 165.544,81.789 U3.10
SPI1_CE1_N: J2.26 U7.2 | length 86.3
  F.Cu w0.254: U7.2 124.415,31.279 v2(125.9,31.279) ; J2.26 154.563,89.672 154.563,82.491 154.559,82.487 154.559,47.435 154.559,37.91 v1(154.051,37.402)
  B.Cu w0.254: v2(125.9,31.279) 147.9,31.279 153.1,36.479 154.023,37.402 v1(154.051,37.402)
SPI1_CLK: J2.23 U3.13 U7.5 | length 95.6
  F.Cu w0.254: U7.5 124.415,34.579 v2(125.8,34.579) ; J2.23 155.926,86.454 156.337,86.043 156.464,85.916 156.464,82.106 ; v1(156.464,47.435) 156.464,48.197 156.464,82.106 ; U3.13 159.702,77.979 156.464,81.217 156.464,82.106
  B.Cu w0.254: v2(125.8,34.579) 148.027,34.579 156.464,43.016 156.464,43.625 v1(156.464,47.435)
SPI1_MISO: J2.21 U3.12 U7.7 | length 91
  F.Cu w0.254: U7.7 124.415,36.779 v2(125.85,36.779) ; v1(155.575,44.641) 155.702,44.641 158.496,47.435 v1(158.496,77.28) ; J2.21 158.466,82.263 158.466,82.136 ; v1(158.496,80.963) 158.496,82.106 158.466,82.136 ; U3.12 161.353,79.249 158.466,82.136
  B.Cu w0.254: v2(125.85,36.779) 147.7,36.779 154.25,43.329 155.562,44.641 v1(155.575,44.641) v1@155.575,44.514 ; v1(158.496,77.28) v1(158.496,80.963)
SPI1_MOSI: J2.19 U3.11 U7.3 | length 93.1
  F.Cu w0.254: U7.3 124.415,32.379 v2(125.95,32.379) ; v1(155.575,40.958) 161.036,46.419 v1(161.036,77.153) ; J2.19 161.036,88.279 161.036,82.995 ; v1(161.036,80.898) 161.036,82.995 ; U3.11 163.512,80.519 161.036,82.995
  B.Cu w0.254: v2(125.95,32.379) 147,32.379 154.35,39.729 155.575,40.954 v1(155.575,40.958) v1@155.51,40.958 ; v1(161.036,77.153) v1(161.036,80.898)
SW7_5V_Input: J1.68 J4.2 U1.2 | length 162.8
  F.Cu w0.508: J1.68 170.18,99.759 170.18,107.887 172.466,110.173 195.58,110.173 198.628,107.125 198.628,75.375 196.342,73.089 196.342,52.769 ; U1.2 180.924,16.193 195.287,16.193 198.628,19.534 198.628,50.483 196.342,52.769 ; J4.2 193.777,55.334 196.342,52.769
unconnected-(H1-Pad1): H1.1
unconnected-(H2-Pad1): H2.1
unconnected-(H3-Pad1): H3.1
unconnected-(H4-Pad1): H4.1
unconnected-(H5-Pad1): H5.1
unconnected-(H6-Pad1): H6.1
unconnected-(H7-Pad1): H7.1
unconnected-(H8-Pad1): H8.1
unconnected-(J1-Pad8): J1.8
unconnected-(J1-Pad9): J1.9
unconnected-(J1-Pad10): J1.10
unconnected-(J1-Pad11): J1.11
unconnected-(J1-Pad12): J1.12
unconnected-(J1-Pad13): J1.13
unconnected-(J1-Pad14): J1.14
unconnected-(J1-Pad15): J1.15
unconnected-(J1-Pad16): J1.16
unconnected-(J1-Pad17): J1.17
unconnected-(J1-Pad18): J1.18
unconnected-(J1-Pad19): J1.19
unconnected-(J1-Pad20): J1.20
unconnected-(J1-Pad21): J1.21
unconnected-(J1-Pad22): J1.22
unconnected-(J1-Pad23): J1.23
unconnected-(J1-Pad24): J1.24
unconnected-(J1-Pad25): J1.25
unconnected-(J1-Pad26): J1.26
unconnected-(J1-Pad27): J1.27
unconnected-(J1-Pad28): J1.28
unconnected-(J1-Pad29): J1.29
unconnected-(J1-Pad30): J1.30
unconnected-(J1-Pad31): J1.31
unconnected-(J1-Pad33): J1.33
unconnected-(J1-Pad34): J1.34
unconnected-(J1-Pad35): J1.35
unconnected-(J1-Pad36): J1.36
unconnected-(J1-Pad37): J1.37
unconnected-(J1-Pad38): J1.38
unconnected-(J1-Pad39): J1.39
unconnected-(J1-Pad40): J1.40
unconnected-(J1-Pad42): J1.42
unconnected-(J1-Pad44): J1.44
unconnected-(J1-Pad45): J1.45
unconnected-(J1-Pad46): J1.46
unconnected-(J1-Pad47): J1.47
unconnected-(J1-Pad48): J1.48
unconnected-(J1-Pad49): J1.49
unconnected-(J1-Pad50): J1.50
unconnected-(J1-Pad51): J1.51
unconnected-(J1-Pad52): J1.52
unconnected-(J1-Pad53): J1.53
unconnected-(J1-Pad54): J1.54
unconnected-(J1-Pad55): J1.55
unconnected-(J1-Pad56): J1.56
unconnected-(J1-Pad57): J1.57
unconnected-(J1-Pad58): J1.58
unconnected-(J1-Pad59): J1.59
unconnected-(J1-Pad60): J1.60
unconnected-(J1-Pad62): J1.62
unconnected-(J1-Pad63): J1.63
unconnected-(J1-Pad64): J1.64
unconnected-(J1-Pad65): J1.65
unconnected-(J1-Pad67): J1.67
unconnected-(J1-Pad70): J1.70
unconnected-(J1-Pad71): J1.71
unconnected-(J1-Pad72): J1.72
unconnected-(J1-Pad75): J1.75
unconnected-(J1-Pad76): J1.76
unconnected-(J1-Pad77): J1.77
unconnected-(J1-Pad78): J1.78
unconnected-(J1-Pad79): J1.79
unconnected-(J1-Pad80): J1.80
unconnected-(J1-Pad83): J1.83
unconnected-(J1-Pad85): J1.85
unconnected-(J1-Pad86): J1.86
unconnected-(J1-Pad87): J1.87
unconnected-(J1-Pad88): J1.88
unconnected-(J1-Pad89): J1.89
unconnected-(J1-Pad90): J1.90
unconnected-(J1-Pad91): J1.91
unconnected-(J1-Pad92): J1.92
unconnected-(J1-Pad93): J1.93
unconnected-(J1-Pad94): J1.94
unconnected-(J1-Pad95): J1.95
unconnected-(J1-Pad96): J1.96
unconnected-(J1-Pad97): J1.97
unconnected-(J1-Pad98): J1.98
unconnected-(J1-Pad101): J1.101
unconnected-(J1-Pad102): J1.102
unconnected-(J1-Pad103): J1.103
unconnected-(J1-Pad104): J1.104
unconnected-(J2-Pad7): J2.7
unconnected-(J2-Pad18): J2.18
unconnected-(J2-Pad22): J2.22
unconnected-(J2-Pad27): J2.27
unconnected-(J2-Pad28): J2.28
unconnected-(U1-Pad3): U1.3
unconnected-(U3-Pad3): U3.3
unconnected-(U3-Pad4): U3.4
unconnected-(U3-Pad5): U3.5
unconnected-(U3-Pad6): U3.6
unconnected-(U3-Pad7): U3.7
unconnected-(U3-Pad8): U3.8
unconnected-(U4-Pad2): U4.2
unconnected-(U4-Pad5): U4.5
unconnected-(U4-Pad7): U4.7
unconnected-(U7-Pad1): U7.1
unconnected-(U7-Pad8): U7.8
VCC_BAT: D5.2 U5.3 | length 13.1
  F.Cu w0.254: D5.2 132.588,56.579 136.906,60.897 136.906,62.167 136.017,63.056 U5.3
VCC_RPI_3V3: J2.1 J2.17
XCO1: C5.2 U5.1 Y1.1 | length 3.7
  F.Cu w0.254: C5.2 Y1.1 134.763,65.561 U5.1
XCO2: C6.2 U5.2 Y1.2 | length 3.7
  F.Cu w0.254: C6.2 132.601,64.348 Y1.2 132.623,64.326 U5.2

## Polygon pours and split planes (outlines as drawn)
GND on In1.Cu "In1.Cu-GND" (solid, remove dead copper, pour order 0): 199.39,15.177 109.22,15.177 109.22,111.189 199.39,111.189
+3V3 on In2.Cu "In2.Cu-+3V3" (solid, remove dead copper, pour order 1): 199.39,15.177 109.22,15.177 109.22,111.189 199.39,111.189

## Keep-outs
Edge.Cuts:
  lines w0.1: 109.22,20.384 ccw(c114.3,20.384) 114.3,15.304 ; 109.22,20.384 ccw(c114.3,20.384) 114.3,15.304 ; 109.22,20.384 109.22,51.707 ; 109.22,20.384 109.22,51.707 ; 109.22,51.707 cw(c110.363,51.707) 110.363,52.85 ; 109.22,51.707 cw(c110.363,51.707) 110.363,52.85 ; 109.22,74.867 ccw(c110.363,74.867) 110.363,73.724 ; 109.22,74.867 ccw(c110.363,74.867) 110.363,73.724 ; 109.22,74.867 109.22,106.109 ; 109.22,74.867 109.22,106.109 ; 109.22,106.109 cw(c114.3,106.109) 114.3,111.189 ; 109.22,106.109 cw(c114.3,106.109) 114.3,111.189 ; 110.363,52.85 ccw(c110.363,53.993) 111.506,53.993 ; 110.363,52.85 ccw(c110.363,53.993) 111.506,53.993 ; 110.363,73.724 cw(c110.363,72.581) 111.506,72.581 ; 110.363,73.724 cw(c110.363,72.581) 111.506,72.581 ; 111.506,53.993 111.506,72.581 ; 111.506,53.993 111.506,72.581 ; 114.3,15.304 143.764,15.304 ; 114.3,15.304 143.764,15.304 ; 114.3,111.189 144.318,111.189 ; 114.3,111.189 144.318,111.189 ; 143.764,15.304 ccw(c143.764,16.447) 144.907,16.447 ; 143.764,15.304 ccw(c143.764,16.447) 144.907,16.447 ; 144.318,111.189 cw(c144.318,110.046) 145.461,110.046 ; 144.318,111.189 cw(c144.318,110.046) 145.461,110.046 ; 144.907,16.447 cw(c145.923,16.447) 145.923,17.463 ; 144.907,16.447 cw(c145.923,16.447) 145.923,17.463 ; 145.461,110.046 ccw(c146.604,110.046) 146.604,108.903 ; 145.461,110.046 ccw(c146.604,110.046) 146.604,108.903 ; 145.923,17.463 164.973,17.463 ; 145.923,17.463 164.973,17.463 ; 146.604,108.903 164.592,108.903 ; 146.604,108.903 164.592,108.903 ; 164.592,108.903 ccw(c164.592,110.046) 165.735,110.046 ; 164.592,108.903 ccw(c164.592,110.046) 165.735,110.046 ; 164.973,17.463 cw(c164.973,16.447) 165.989,16.447 ; 164.973,17.463 cw(c164.973,16.447) 165.989,16.447 ; 165.735,110.046 cw(c166.878,110.046) 166.878,111.189 ; 165.735,110.046 cw(c166.878,110.046) 166.878,111.189 ; 165.989,16.447 ccw(c167.132,16.447) 167.132,15.304 ; 165.989,16.447 ccw(c167.132,16.447) 167.132,15.304 ; 166.878,111.189 194.31,111.189 ; 166.878,111.189 194.31,111.189 ; 167.132,15.304 194.31,15.304 ; 167.132,15.304 194.31,15.304 ; 194.31,15.304 ccw(c194.31,20.384) 199.39,20.384 ; 194.31,15.304 ccw(c194.31,20.384) 199.39,20.384 ; 194.31,111.189 cw(c194.31,106.109) 199.39,106.109 ; 194.31,111.189 cw(c194.31,106.109) 199.39,106.109 ; 197.104,53.785 ccw(c198.247,53.785) 198.247,52.642 ; 197.104,53.785 ccw(c198.247,53.785) 198.247,52.642 ; 197.104,53.785 197.104,72.327 ; 197.104,53.785 197.104,72.327 ; 197.104,72.327 cw(c198.247,72.327) 198.247,73.47 ; 197.104,72.327 cw(c198.247,72.327) 198.247,73.47 ; 198.247,52.642 cw(c198.247,51.499) 199.39,51.499 ; 198.247,52.642 cw(c198.247,51.499) 199.39,51.499 ; 198.247,73.47 ccw(c198.247,74.613) 199.39,74.613 ; 198.247,73.47 ccw(c198.247,74.613) 199.39,74.613 ; 199.39,20.384 199.39,51.499 ; 199.39,20.384 199.39,51.499 ; 199.39,74.613 199.39,106.109 ; 199.39,74.613 199.39,106.109

## Silkscreen, mask and mechanical layers (free items; w line width, h text height)
F.SilkS:
  circle w0.15: c186.944,108.649 r0.568
  text "Microraptor" at 117.283,96.077 h1
  text "TEST" at 189.169,70.265 h1
  text "TP-SENS1" at 193.934,43.814 h1 r90
  text "TP-SENS2" at 193.68,32.297 h1 r90
  text "OFF" at 170.026,27.466 h1
  text "ON" at 187.522,27.466 h1
B.SilkS:
  text "2022-2023 OBC Team: / Jillian Malherbe / Ivan Lipski / Aahash Suthahar  / Alex Jiang  / Catarina Borges  / Mike Stefan  / Michael Cassidy  / Matthew Morcos  / Anders Lossius  / Katherine Eriksson  / Shivani Sivachandran  / Nicholas Chu  / Harrison Gordon" at 140.141,69.943 h1

## Dimensions
199.39,15.304 to 194.31,15.304 on F.Fab
109.22,84.519 to 130.81,84.519 on F.Fab
199.39,15.304 to 199.39,20.384 on F.Fab
109.22,111.189 to 109.22,106.109 on F.Fab
109.22,111.189 to 199.39,111.189 on F.Fab
109.22,111.189 to 118.11,111.189 on F.Fab
109.22,15.304 to 114.3,15.304 on F.Fab
109.22,111.189 to 109.22,15.304 on F.Fab
109.22,111.189 to 191.77,111.189 on F.Fab
109.22,15.304 to 109.22,20.384 on F.Fab

## Text inside footprints (layer, text, board x,y; h text height)
J1: F.SilkS "H2" at 188.698,97.828 h1; F.SilkS "H1" at 188.734,101.133 h1
U1: F.Fab "*" at 189.108,16.711 h1; F.Fab "*" at 189.108,17.473 h1; F.Fab "*" at 185.895,12.203 h1; F.Fab "*" at 185.895,12.203 h1; Cmts.User "Copyright 2021 Accelerated Designs. All rights reserved." at 182.781,18.176 h0.13
U5: F.Fab "*" at 135.463,65.949 h1; F.Fab "*" at 135.463,65.949 h1; F.SilkS "*" at 134.498,66.114 h1; Cmts.User "0.022in/0.559mm" at 140.465,65.31 h1; Cmts.User "0.186in/4.724mm" at 135.055,68.269 h1; Cmts.User "0.05in/1.27mm" at 129.948,64.675 h1; Cmts.User "Copyright 2021 Accelerated Designs. All rights reserved." at 136.299,63.642 h0.13; Cmts.User "0.078in/1.981mm" at 132.693,58.541 h1
U6: F.Fab "*" at 180.726,40.206 h1; F.Fab "*" at 184.282,46.302 h1; Cmts.User "0.032in/0.813mm" at 183.696,48.915 h1; Cmts.User "0.02in/0.5mm" at 187.199,45.634 h1; Cmts.User "0.069in/1.753mm" at 182.299,50.185 h1; Cmts.User "Copyright 2021 Accelerated Designs. All rights reserved." at 183.543,46.371 h0.13; Cmts.User "0.11in/2.794mm" at 182.451,42.717 h1; Cmts.User "0.01in/0.254mm" at 178.006,45.384 h1; Cmts.User "0.061in/1.549mm" at 178.388,46.134 h1